# Altium PCB PCBd.PcbDoc
Units mm, origin at the board's own origin, x right, y up, seen from the top; angles counter-clockwise.
Board outline 100 x 100 mm, 2 copper layers (Top Layer, Bottom Layer); 119 components, 57 nets, 306 pads, 26 vias.
Unrouted connection lines stored in the file: 1.
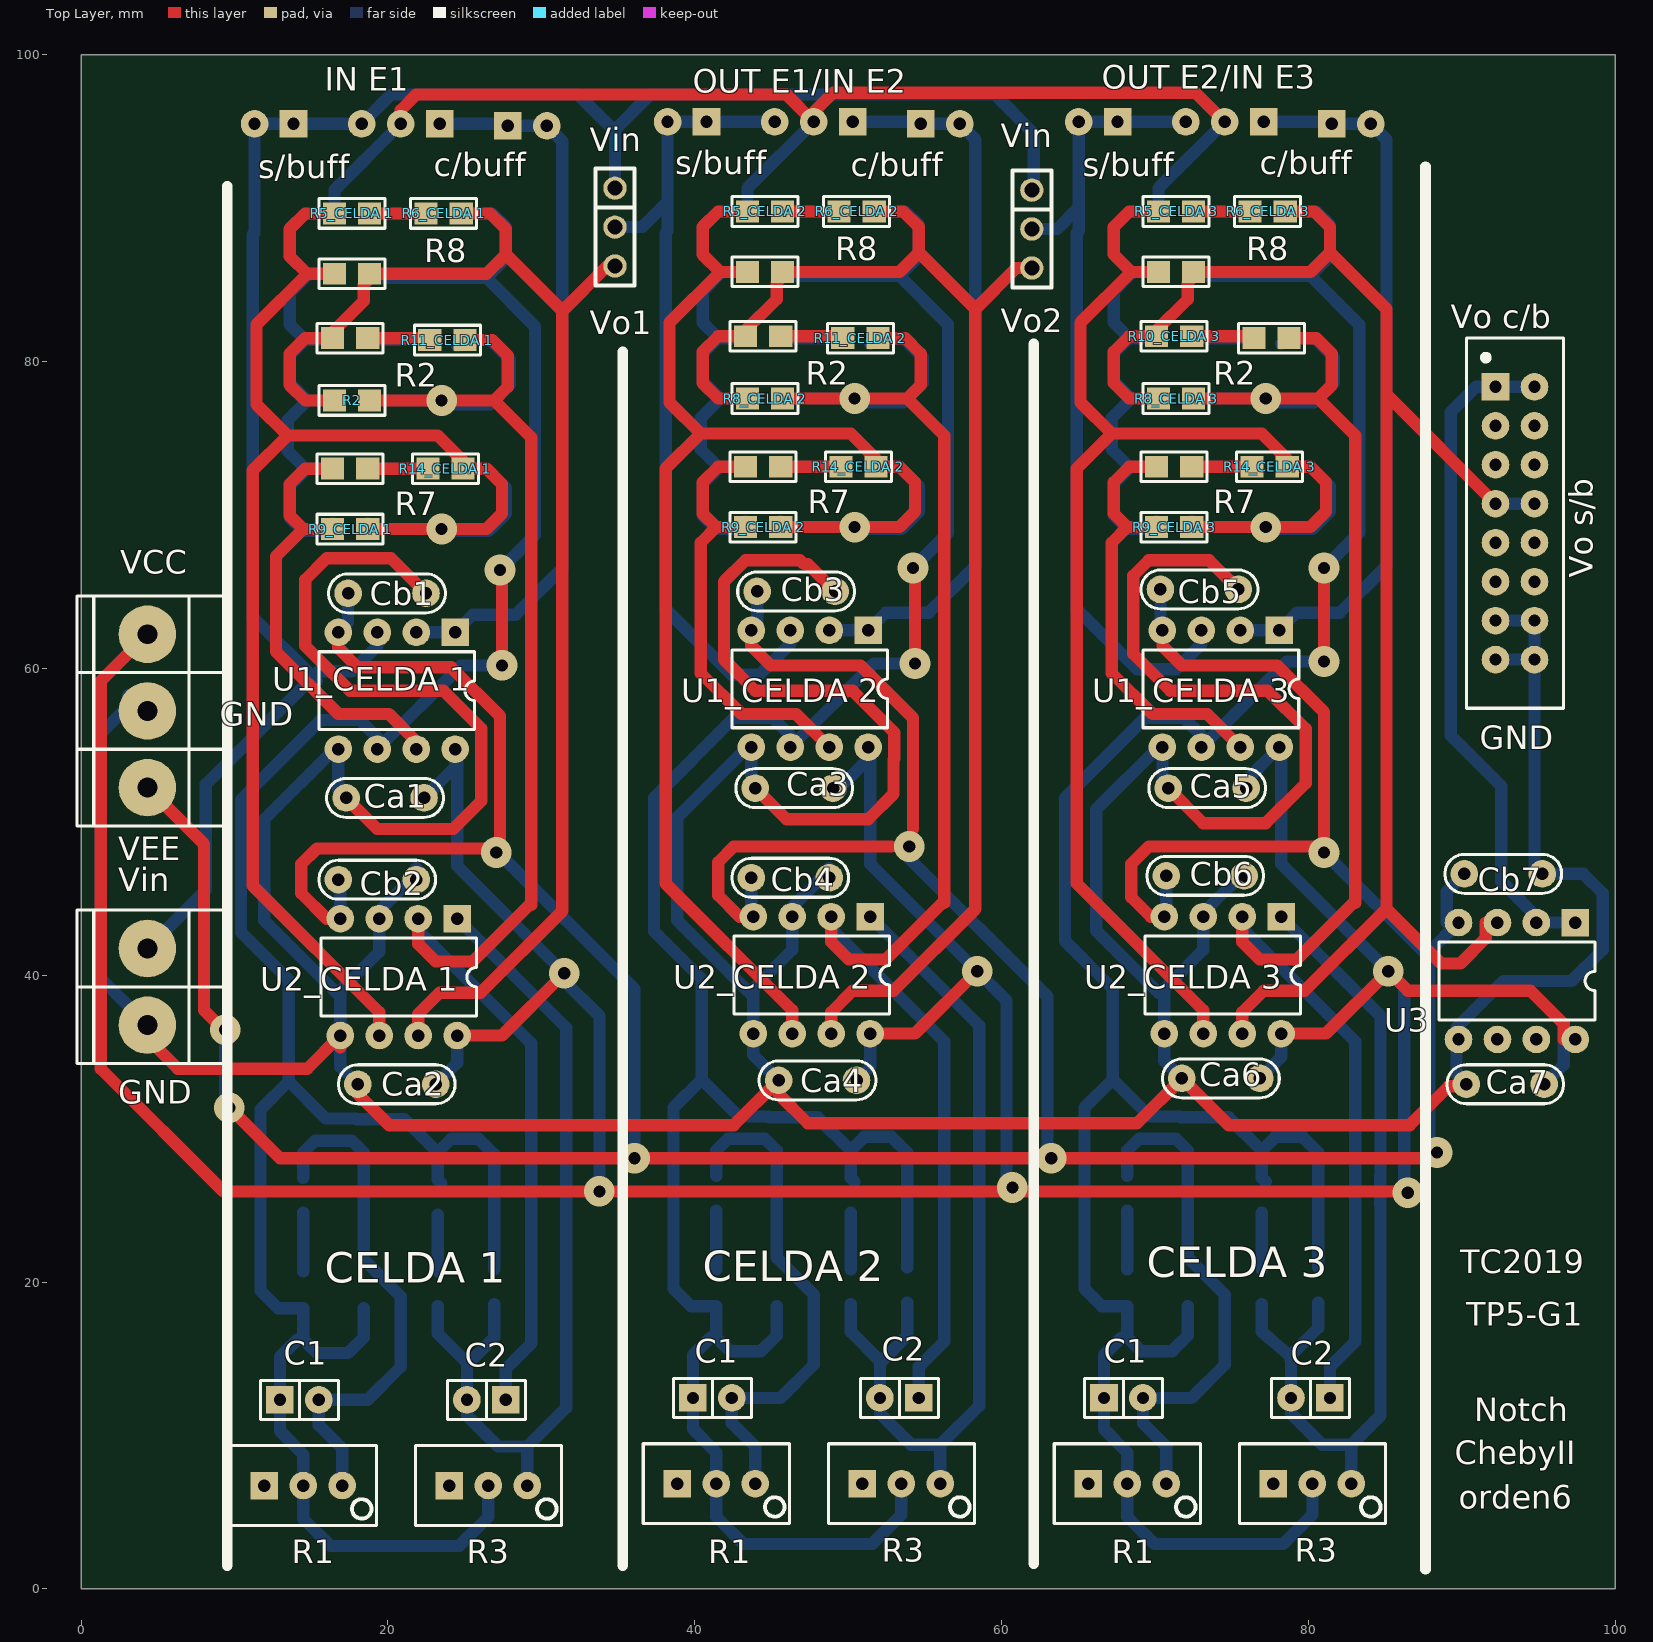
[diagram p0: Top Layer view]
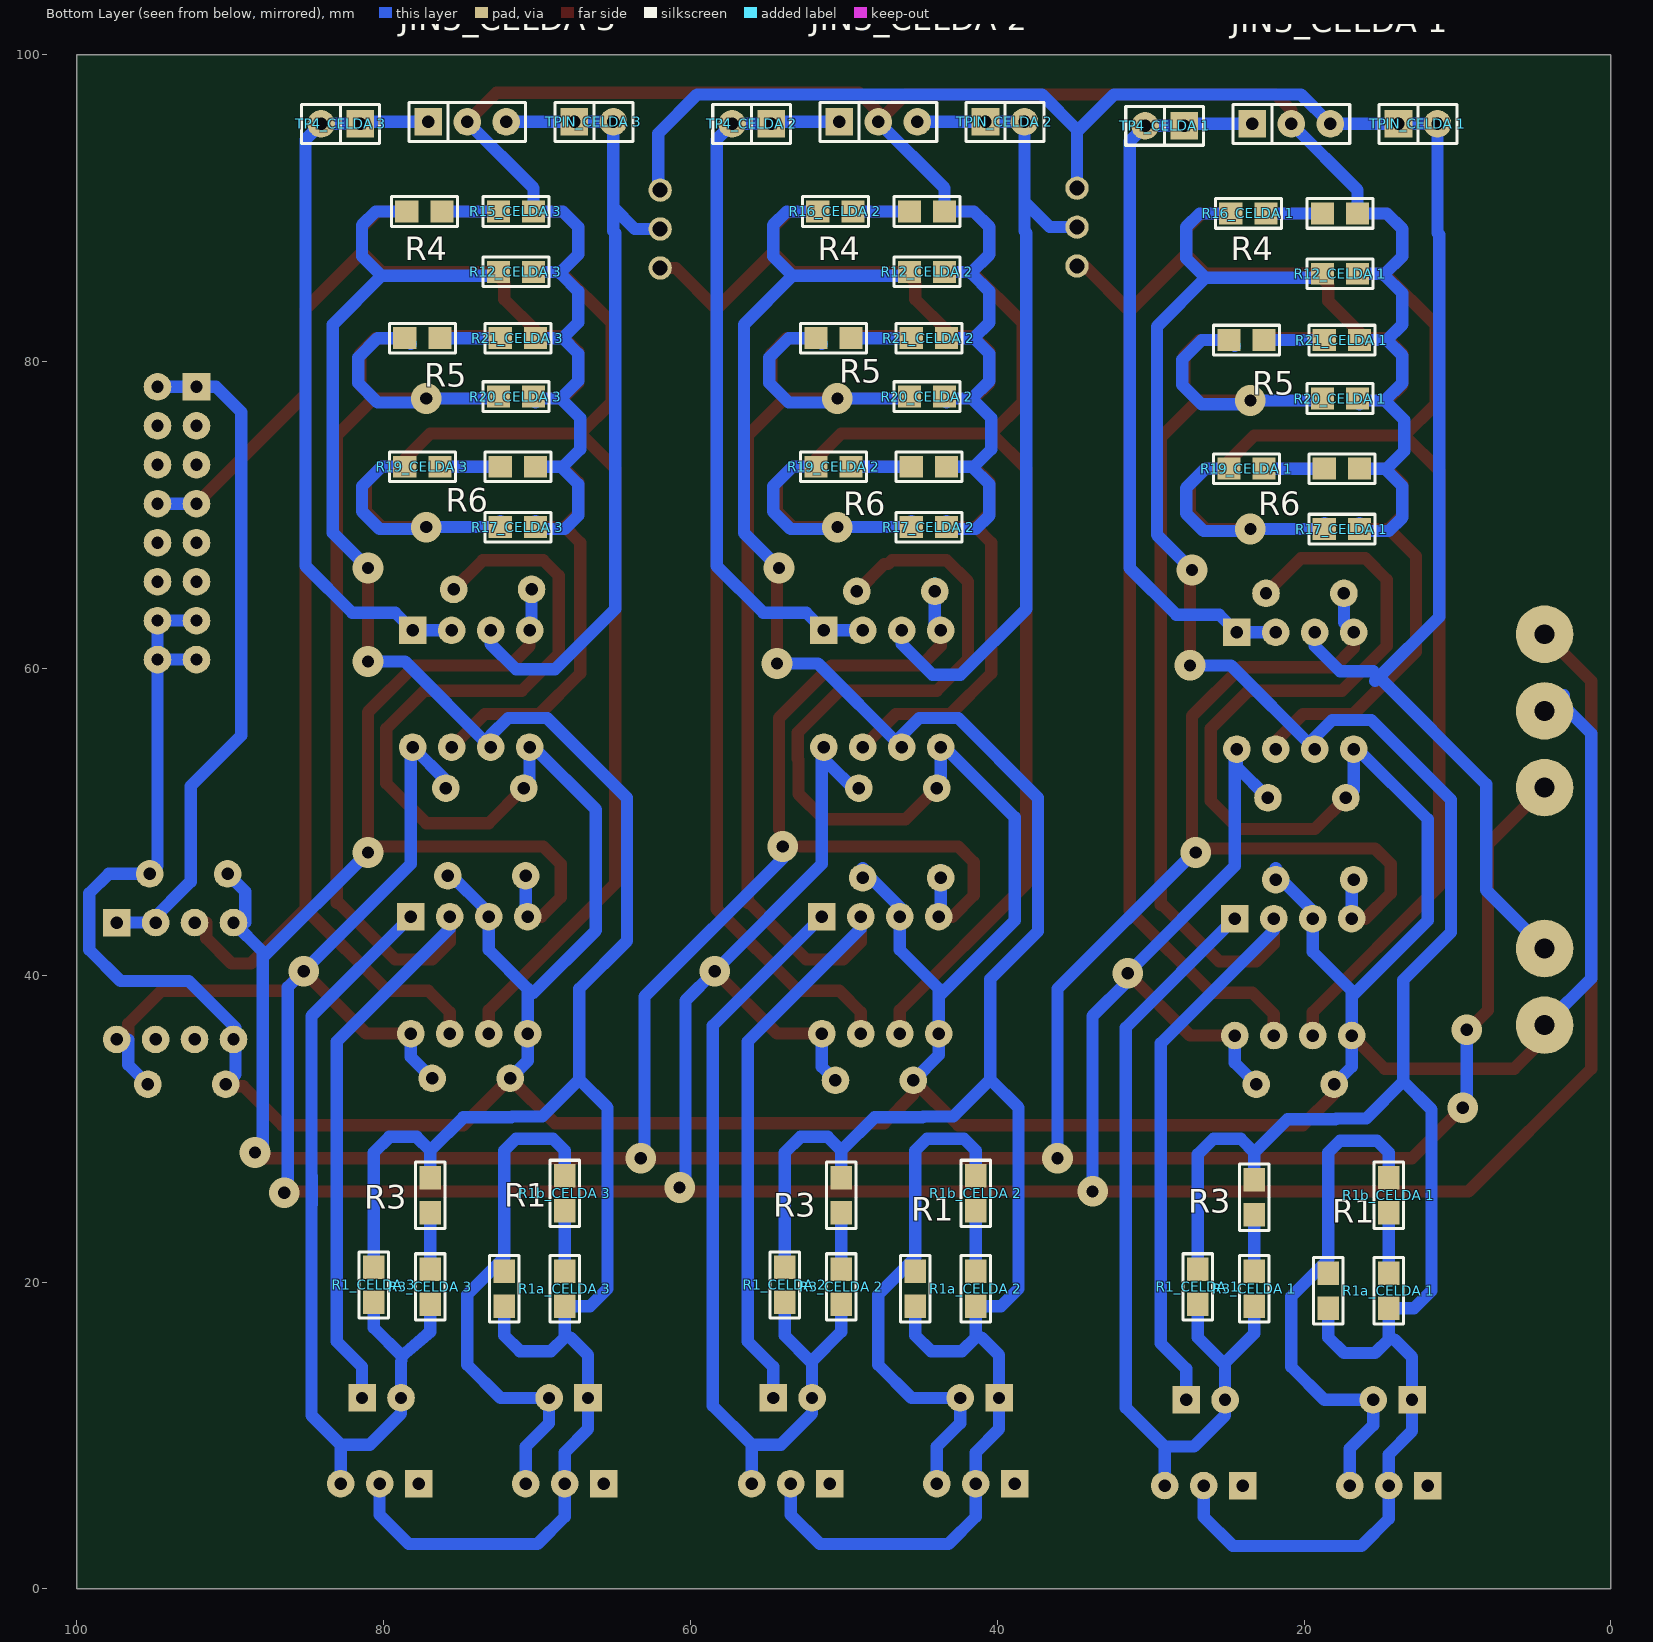
[diagram p1: Bottom Layer view, seen from below]

## Layer stack, top to bottom
Top Solder: solder mask 0.0102, Solder Resist, Dk 3.5
Top Layer: signal copper 0.0356
Dielectric 1: dielectric 0.32, FR-4, Dk 4.8
Bottom Layer: signal copper 0.0356
Bottom Solder: solder mask 0.0102, Solder Resist, Dk 3.5

## Board outline
0,0 100,0 100,100 0,100

## Design rules (kind name [scope] priority, off if disabled: settings)
Clearance [All] p1: gap=0.4 ignorepadtopadclearanceinfootprint=FALSE
PolygonConnect [All] p1: connectstyle=Relief reliefconductorwidth=0.254 reliefentries=4 polygonreliefangle="90 Angle" airgapwidth=0.254
RoomDefinition "CELDA 1" [InComponentClass('CELDA 1')] p1: confinementstyle=ConfineIn formatcopy=TRUE lockcomponents=FALSE outline 9.144,1.016 34.798,1.016 34.798,99.568 9.144,99.568
RoomDefinition filter [InComponentClass('filter')] p2: confinementstyle=ConfineIn formatcopy=TRUE lockcomponents=FALSE outline -17.653,-29.337 118.999,-29.337 118.999,-4.191 -17.653,-4.191
RoomDefinition "CELDA 3" [InComponentClass('CELDA 3')] p3: confinementstyle=ConfineIn formatcopy=TRUE lockcomponents=FALSE outline 62.865,1.143 88.519,1.143 88.519,99.695 62.865,99.695
RoomDefinition "CELDA 2" [InComponentClass('CELDA 2')] p4: confinementstyle=ConfineIn formatcopy=TRUE lockcomponents=FALSE outline 36.068,1.143 61.722,1.143 61.722,99.695 36.068,99.695
RoutingVias [All] p1: holewidth=0.4 width=2 viastyle="Through Hole" minholewidth=0.3 minwidth=1.5 maxholewidth=0.5 maxwidth=2
SolderMaskExpansion [All] p1: expansion=0.102
Width [All] p1: maxlimit=0.9 minlimit=0.6 preferedwidth=0.8
30 further rules are at their usual default settings.

## Classes and differential pairs
channel class fleischerTowR1: "CELDA 1" "CELDA 2" "CELDA 3"
component class filter: Ca1 Ca2 Ca3 Ca4 Ca5 Ca6 Ca7 Cb1 Cb2 Cb3 Cb4 Cb5 Cb6 Cb7 R7 U3 VCC VIN Vin
component class "CELDA 3": C1 C2 "JIN3_CELDA 3" R1 "R1a_CELDA 3" "R1b_CELDA 3" R2 R3 "R3_CELDA 3" R4 R5 "R5_CELDA 3" R6 "R6_CELDA 3" R7 R8 "R8_CELDA 3" "R9_CELDA 3" "R10_CELDA 3" "R12_CELDA 3" "R14_CELDA 3" "R15_CELDA 3" "R17_CELDA 3" "R19_CELDA 3" "R20_CELDA 3" "R21_CELDA 3" "TP4_CELDA 3" "TPIN_CELDA 3" "U1_CELDA 3" "U2_CELDA 3"
component class "CELDA 2": C1 C2 "JIN3_CELDA 2" R1 "R1_CELDA 2" "R1a_CELDA 2" "R1b_CELDA 2" R2 R3 "R3_CELDA 2" R4 R5 "R5_CELDA 2" R6 "R6_CELDA 2" R7 R8 "R8_CELDA 2" "R9_CELDA 2" "R11_CELDA 2" "R12_CELDA 2" "R14_CELDA 2" "R16_CELDA 2" "R17_CELDA 2" "R19_CELDA 2" "R20_CELDA 2" "R21_CELDA 2" "TP4_CELDA 2" "TPIN_CELDA 2" "U1_CELDA 2" "U2_CELDA 2"
component class "CELDA 1": C1 C2 "JIN3_CELDA 1" R1 "R1_CELDA 1" "R1a_CELDA 1" "R1b_CELDA 1" R2 R3 "R3_CELDA 1" R4 R5 "R5_CELDA 1" R6 "R6_CELDA 1" R7 R8 "R9_CELDA 1" "R11_CELDA 1" "R12_CELDA 1" "R14_CELDA 1" "R16_CELDA 1" "R17_CELDA 1" "R19_CELDA 1" "R20_CELDA 1" "R21_CELDA 1" "TP4_CELDA 1" "TPIN_CELDA 1" "U1_CELDA 1" "U2_CELDA 1"

## Components (designator, comment, footprint, x,y, rotation, side; value= is the part's Value field where it differs from the comment)
C1 "C1" SIP2 67.945,12.446 r0 top (schematic designator J2)
C1 "C1" SIP2 41.148,12.446 r0 top (schematic designator J2)
C1 "C1" SIP2 14.224,12.319 r0 top (schematic designator J2)
C2 "C2" SIP2 80.137,12.446 r180 top (schematic designator J1)
C2 "C2" SIP2 53.34,12.446 r180 top (schematic designator J1)
C2 "C2" SIP2 26.416,12.319 r180 top (schematic designator J1)
Ca1 "CAP" CAP200 19.812,51.562 r180 top
Ca2 "CAP" CAP200 20.574,32.893 r180 top
Ca3 "CAP" CAP200 46.482,52.197 r180 top
Ca4 "CAP" CAP200 48.006,33.147 r180 top
Ca5 "CAP" CAP200 73.406,52.197 r180 top
Ca6 "CAP" CAP200 74.295,33.274 r180 top
Ca7 "CAP" CAP200 92.837,32.893 r180 top
Cb1 "CAP" CAP200 19.939,64.897 r0 top
Cb2 "CAP" CAP200 19.304,46.228 r0 top
Cb3 "CAP" CAP200 46.609,65.024 r0 top
Cb4 "CAP" CAP200 46.228,46.355 r0 top
Cb5 "CAP" CAP200 72.898,65.151 r0 top
Cb6 "CAP" CAP200 73.279,46.482 r0 top
Cb7 "CAP" CAP200 92.71,46.609 r0 top
"JIN3_CELDA 1" "JUMPER" JUMPER3 20.828,95.504 r180 bottom (schematic designator JIN3)
"JIN3_CELDA 2" "JUMPER" JUMPER3 47.752,95.631 r180 bottom (schematic designator JIN3)
"JIN3_CELDA 3" "JUMPER" JUMPER3 74.549,95.631 r180 bottom (schematic designator JIN3)
R1 "PRESET" "PRESET V" 68.199,6.858 r0 top (schematic designator R1var)
R1 "PRESET" "PRESET V" 41.402,6.858 r0 top (schematic designator R1var)
R1 "PRESET" "PRESET V" 14.478,6.731 r0 top (schematic designator R1var)
R1 "RES" 0805 72.136,19.558 r90 bottom (schematic designator R1p)
R1 "RES" 0805 45.339,19.558 r90 bottom (schematic designator R1p)
R1 "RES" 0805 18.415,19.431 r90 bottom (schematic designator R1p)
"R1_CELDA 1" "RES" 0805 26.924,19.685 r270 bottom (schematic designator R1)
"R1_CELDA 2" "RES" 0805 53.848,19.812 r270 bottom (schematic designator R1)
"R1_CELDA 3" "RES" 0805 80.645,19.812 r270 bottom (schematic designator R1)
"R1a_CELDA 1" "RES" 0805 14.478,19.431 r90 bottom (schematic designator R1a)
"R1a_CELDA 2" "RES" 0805 41.402,19.558 r90 bottom (schematic designator R1a)
"R1a_CELDA 3" "RES" 0805 68.199,19.558 r90 bottom (schematic designator R1a)
"R1b_CELDA 1" "RES" 0805 14.478,25.654 r90 bottom (schematic designator R1b)
"R1b_CELDA 2" "RES" 0805 41.402,25.781 r90 bottom (schematic designator R1b)
"R1b_CELDA 3" "RES" 0805 68.199,25.781 r90 bottom (schematic designator R1b)
R2 "RES" 0805 77.597,81.534 r0 top (schematic designator R11)
R2 "RES" 0805 44.45,81.661 r0 top (schematic designator R10)
R2 "RES" 0805 17.526,81.534 r0 top (schematic designator R10)
R2 "RES" 0805 17.653,77.47 r0 top (schematic designator R8)
R3 "PRESET" "PRESET V" 80.264,6.858 r0 top (schematic designator R3var)
R3 "PRESET" "PRESET V" 53.467,6.858 r0 top (schematic designator R3var)
R3 "PRESET" "PRESET V" 26.543,6.731 r0 top (schematic designator R3var)
R3 "RES" 0805 76.962,25.654 r270 bottom (schematic designator R2)
R3 "RES" 0805 50.165,25.654 r270 bottom (schematic designator R2)
R3 "RES" 0805 23.241,25.527 r270 bottom (schematic designator R2)
"R3_CELDA 1" "RES" 0805 23.241,19.558 r270 bottom (schematic designator R3)
"R3_CELDA 2" "RES" 0805 50.165,19.685 r270 bottom (schematic designator R3)
"R3_CELDA 3" "RES" 0805 76.962,19.685 r270 bottom (schematic designator R3)
R4 "RES" 0805 77.343,89.789 r0 bottom (schematic designator R16)
R4 "RES" 0805 44.577,89.789 r0 bottom (schematic designator R15)
R4 "RES" 0805 17.653,89.662 r0 bottom (schematic designator R15)
R5 "RES" 0805 77.47,81.534 r0 bottom (schematic designator R22)
R5 "RES" 0805 50.673,81.534 r0 bottom (schematic designator R22)
R5 "RES" 0805 23.749,81.407 r0 bottom (schematic designator R22)
"R5_CELDA 1" "RES" 0805 17.653,89.662 r0 top (schematic designator R5)
"R5_CELDA 2" "RES" 0805 44.577,89.789 r0 top (schematic designator R5)
"R5_CELDA 3" "RES" 0805 71.374,89.789 r0 top (schematic designator R5)
R6 "RES" 0805 71.247,73.152 r0 bottom (schematic designator R18)
R6 "RES" 0805 44.45,73.152 r0 bottom (schematic designator R18)
R6 "RES" 0805 17.526,73.025 r0 bottom (schematic designator R18)
"R6_CELDA 1" "RES" 0805 23.622,89.662 r0 top (schematic designator R6)
"R6_CELDA 2" "RES" 0805 50.546,89.789 r0 top (schematic designator R6)
"R6_CELDA 3" "RES" 0805 77.343,89.789 r0 top (schematic designator R6)
R7 "RES" 0805 71.247,73.152 r0 top (schematic designator R13)
R7 "RES" 0805 44.45,73.152 r0 top (schematic designator R13)
R7 "RES" 0805 17.526,73.025 r0 top (schematic designator R13)
R8 "RES" 0805 71.374,85.852 r0 top (schematic designator R4)
R8 "RES" 0805 44.577,85.852 r0 top (schematic designator R4)
R8 "RES" 0805 17.653,85.725 r0 top (schematic designator R4)
"R8_CELDA 2" "RES" 0805 44.577,77.597 r0 top (schematic designator R8)
"R8_CELDA 3" "RES" 0805 71.374,77.597 r0 top (schematic designator R8)
"R9_CELDA 1" "RES" 0805 17.526,69.088 r0 top (schematic designator R9)
"R9_CELDA 2" "RES" 0805 44.45,69.215 r0 top (schematic designator R9)
"R9_CELDA 3" "RES" 0805 71.247,69.215 r0 top (schematic designator R9)
"R10_CELDA 3" "RES" 0805 71.247,81.661 r0 top (schematic designator R10)
"R11_CELDA 1" "RES" 0805 23.876,81.407 r0 top (schematic designator R11)
"R11_CELDA 2" "RES" 0805 50.8,81.534 r0 top (schematic designator R11)
"R12_CELDA 1" "RES" 0805 17.653,85.725 r0 bottom (schematic designator R12)
"R12_CELDA 2" "RES" 0805 44.577,85.852 r0 bottom (schematic designator R12)
"R12_CELDA 3" "RES" 0805 71.374,85.852 r0 bottom (schematic designator R12)
"R14_CELDA 1" "RES" 0805 23.749,73.025 r0 top (schematic designator R14)
"R14_CELDA 2" "RES" 0805 50.673,73.152 r0 top (schematic designator R14)
"R14_CELDA 3" "RES" 0805 77.47,73.152 r0 top (schematic designator R14)
"R15_CELDA 3" "RES" 0805 71.374,89.789 r0 bottom (schematic designator R15)
"R16_CELDA 1" "RES" 0805 23.622,89.662 r0 bottom (schematic designator R16)
"R16_CELDA 2" "RES" 0805 50.546,89.789 r0 bottom (schematic designator R16)
"R17_CELDA 1" "RES" 0805 17.526,69.088 r0 bottom (schematic designator R17)
"R17_CELDA 2" "RES" 0805 44.45,69.215 r0 bottom (schematic designator R17)
"R17_CELDA 3" "RES" 0805 71.247,69.215 r0 bottom (schematic designator R17)
"R19_CELDA 1" "RES" 0805 23.749,73.025 r0 bottom (schematic designator R19)
"R19_CELDA 2" "RES" 0805 50.673,73.152 r0 bottom (schematic designator R19)
"R19_CELDA 3" "RES" 0805 77.47,73.152 r0 bottom (schematic designator R19)
"R20_CELDA 1" "RES" 0805 17.653,77.597 r0 bottom (schematic designator R20)
"R20_CELDA 2" "RES" 0805 44.577,77.724 r0 bottom (schematic designator R20)
"R20_CELDA 3" "RES" 0805 71.374,77.724 r0 bottom (schematic designator R20)
"R21_CELDA 1" "RES" 0805 17.526,81.407 r0 bottom (schematic designator R21)
"R21_CELDA 2" "RES" 0805 44.45,81.534 r0 bottom (schematic designator R21)
"R21_CELDA 3" "RES" 0805 71.247,81.534 r0 bottom (schematic designator R21)
"TP4_CELDA 1" "JUMPER" JUMPER2 29.083,95.377 r0 bottom (schematic designator TP4)
"TP4_CELDA 2" "JUMPER" JUMPER2 56.007,95.504 r0 bottom (schematic designator TP4)
"TP4_CELDA 3" "JUMPER" JUMPER2 82.804,95.504 r0 bottom (schematic designator TP4)
"TPIN_CELDA 1" "JUMPER" JUMPER2 12.573,95.504 r180 bottom (schematic designator TPIN)
"TPIN_CELDA 2" "JUMPER" JUMPER2 39.497,95.631 r180 bottom (schematic designator TPIN)
"TPIN_CELDA 3" "JUMPER" JUMPER2 66.294,95.631 r180 bottom (schematic designator TPIN)
"U1_CELDA 1" "LM833" DIP8 24.384,62.357 r270 top (schematic designator U1)
"U1_CELDA 2" "LM833" DIP8 51.308,62.484 r270 top (schematic designator U1)
"U1_CELDA 3" "LM833" DIP8 78.105,62.484 r270 top (schematic designator U1)
"U2_CELDA 1" "LM833" DIP8 24.511,43.688 r270 top (schematic designator U2)
"U2_CELDA 2" "LM833" DIP8 51.435,43.815 r270 top (schematic designator U2)
"U2_CELDA 3" "LM833" DIP8 78.232,43.815 r270 top (schematic designator U2)
U3 "LM833" DIP8 97.409,43.434 r270 top
VCC "BORNERA 3" BORNERA3 4.318,57.23 r0 top (schematic designator JVCC1)
Vin "JUMPER" JUMPER3TH 61.976,91.186 r0 top (schematic designator Jin33)
Vin "JUMPER" JUMPER3TH 34.798,91.313 r0 top (schematic designator Jin2)
Vin "BORNERA 2" BORNERA2 4.318,39.243 r0 top (schematic designator JIN1)
? "OUTPUT" SIP8*2 92.202,78.359 r270 top

## Footprints (in the part's own frame and the unit in brackets; to place one, negate y for a bottom-side part, rotate by r counter-clockwise, add the part's x,y. Pads: shape width x height; smd on the part's side, far side on the other; paste and mask are expansions set on the pad)
0805 [mil] "Pasivo 0805"
  rect 60x56 smd: 1(-45,0) 2(45,0)
  silkscreen extent -85,-38 85,38, body extent -39,-25 39,25, height 15
BORNERA2 [mm] "Bornera con Tornillos 5mm separación"
  round 3.75 hole 1.3: 1(0,2.5) 2(0,-2.5)
  silkscreen extent -4.6,-5 5.2,5, body extent -3.76,-4.89 3.94,5.61, height 10
BORNERA3 [mm] "Bornera con Tornillos 5mm separación"
  round 3.75 hole 1.3: 1(0,5) 2(0,0) 3(0,-5)
  silkscreen extent -4.6,-7.5 5.2,7.5, body extent -3.76,-7.39 3.94,8.11, height 10.05
CAP200 [mm]
  round 1.8 hole 0.813: 1(-2.54,0) 2(2.54,0)
  silkscreen extent -3.81,-1.27 3.81,1.27, body extent -2.79,-1.17 2.79,1.12, height 6.24
DIP8 [mm]
  rect 1.8x1.8 hole 0.813: 1(0,0)
  round 1.8 hole 0.813: 2(0,-2.54) 3(0,-5.08) 4(0,-7.62) 5(7.62,-7.62) 6(7.62,-5.08) 7(7.62,-2.54) 8(7.62,0)
  silkscreen extent 1.27,-8.89 6.35,1.27, body extent -0.06,-9.21 7.7,1.59, height 4.5
JUMPER2 [mm]
  rect 1.8x1.8 hole 0.8: 1(-1.27,0)
  round 1.8 hole 0.8: 2(1.27,0)
  silkscreen extent -2.54,-1.27 2.54,1.27, body extent -2.46,-1.27 2.54,1.27, height 9.5
JUMPER3 [mm]
  rect 1.8x1.8 hole 0.8: 1(-2.54,0)
  round 1.8 hole 0.8: 2(0,0) 3(2.54,0)
  silkscreen extent -3.81,-1.27 3.81,1.27, body extent -3.81,-1.3 3.81,1.27, height 16.15
JUMPER3TH [mil]
  round 60 hole 38: 1(0,0) 2(0,-100) 3(0,-200)
  silkscreen extent -50,-250 50,50, body extent -49,-250 51,50, height 330
"PRESET V" [mm]
  rect 1.8x1.8 hole 0.813: 1(-2.54,0)
  round 1.8 hole 0.813: 2(0,0) 3(2.54,0)
  silkscreen extent -4.76,-2.6 4.76,2.6, body extent -4.7,-2.42 4.83,2.42, height 11.55
SIP2 [mm]
  rect 1.8x1.8 hole 0.8: 1(-1.27,0)
  round 1.8 hole 0.8: 2(1.27,0)
  silkscreen extent -2.54,-1.27 2.54,1.27
SIP8*2 [mm]
  rect 1.8x1.8 hole 0.8: 1(0,0)
  round 1.8 hole 0.8: 2(0,2.54) 3(2.54,0) 4(2.54,2.54) 5(5.08,0) 6(5.08,2.54) 7(7.62,0) 8(7.62,2.54) 9(10.16,0) 10(10.16,2.54) 11(12.7,0) 12(12.7,2.54) 13(15.24,0) 14(15.24,2.54) 15(17.78,0) 16(17.78,2.54)
  silkscreen extent -3.18,-1.91 20.95,4.45, body extent -1.26,-1.3 19.06,3.78, height 10.1

## Part data
C1 C1 C1 C2 C2 C2: library part CON2
"JIN3_CELDA 1" "JIN3_CELDA 2" "JIN3_CELDA 3": library part JUMPER3
"U1_CELDA 1" "U1_CELDA 2" "U1_CELDA 3" "U2_CELDA 1" "U2_CELDA 2" "U2_CELDA 3" U3: "Dual Audio Operational Amplifier"
Vin Vin: library part JUMPER3TH, "TIRA DE PINES 1x3"
?: library part CON8*2

## Via types
v1: diameter 2, hole 0.8, Top Layer to Bottom Layer, 26 vias

## Nets (pads, with @x,y where several pads share a name; then routed paths per layer and width w, separated by ;. In a path a pad name is that pad's centre, name@x,y a point inside that pad or via, vN(x,y) a via of type N, cw(c..) or ccw(c..) an arc to the next point about the centre after c; other vN are vias at no path point)
GND: "U1_CELDA 1.5" "U1_CELDA 2.5" "U1_CELDA 3.5" "U2_CELDA 1.3" "U2_CELDA 1.5" "U2_CELDA 2.3" "U2_CELDA 2.5" "U2_CELDA 3.3" "U2_CELDA 3.5" ?.13 ?.14 ?.15 ?.16 Ca1.2 Ca2.2 Ca3.2 Ca4.2 Ca5.2 Ca6.2 Ca7.2 Cb1.2 Cb2.2 Cb3.2 Cb4.2 Cb5.2 Cb6.2 Cb7.2 U3.5 VCC.2 Vin.2@4.318,36.743 | length 412.4
  Top Layer w0.8: Vin.2@3.302,36.91 6.303,33.909 14.732,33.909 16.891,36.068 16.891,35.306 ; Ca1.2 19.304,49.53 24.257,49.53 26.084,51.357 26.084,56.085 23.622,58.547 17.526,58.547 14.605,61.468 14.605,65.786 16.002,67.183 20.193,67.183 Cb1.2 ; Ca2.2 18.034,32.258 20.066,30.226 42.545,30.226 Ca4.2 45.466,32.258 47.371,30.353 68.834,30.353 Ca6.2 74.803,30.226 86.614,30.226 89.154,32.766 Ca7.2@90.17,32.766 ; Ca3.2 45.974,50.165 51.308,50.165 52.959,51.816 52.959,54.062 53.008,54.111 53.008,55.831 50.292,58.547 43.942,58.547 41.91,60.579 41.91,65.659 43.307,67.056 46.863,67.056 47.117,66.802 47.371,66.802 Cb3.2 ; Ca5.2 73.152,49.911 77.216,49.911 79.826,52.521 79.826,56.064 77.343,58.547 70.993,58.547 68.58,60.96 68.58,66.04 69.596,67.056 73.533,67.056 Cb5.2
  Bottom Layer w0.8: VCC.2@3.048,58.246 VCC.2@5.127,58.246 ; VCC.2@3.429,57.912 1.27,55.753 1.27,39.791 Vin.2@4.151,36.91 ; Vin.2@4.318,36.743 Vin.2@4.151,36.91 ; Vin.2@4.652,36.91 Vin.2@4.151,36.91 ; Ca1.2 16.764,52.07 16.764,54.737 16.51,54.737 11.938,50.165 11.938,43.561 16.891,38.608 ; Ca2.2 16.891,34.036 16.891,36.068 16.891,38.608 ; Cb2.2@21.844,46.99 21.844,46.609 19.431,44.196 19.431,43.688 19.431,41.529 16.891,38.989 16.891,38.608 ; Ca3.2@43.942,51.816 43.688,52.07 43.688,54.864 43.434,54.864 38.862,50.292 38.862,43.561 43.815,38.608 ; Ca4.2 43.815,34.798 43.815,36.195 43.815,38.608 ; Cb4.2@48.768,46.99 48.768,46.863 46.355,44.45 46.355,43.815 46.355,41.656 43.815,39.116 43.815,38.608 ; 70.231,38.862 66.167,42.926 66.167,50.8 70.231,54.864 70.485,54.864 70.485,52.197 70.866,51.816 Ca5.2@70.866,51.689 ; Ca6.2 70.612,34.417 70.612,36.195 70.612,39.116 73.152,41.656 73.152,43.815 73.152,44.069 Cb6.2@75.819,46.736 ; Ca7.2 89.662,33.528 89.662,36.576 92.71,39.624 97.155,39.624 99.187,41.656 99.187,45.339 97.917,46.609 Cb7.2 94.742,47.117 ?.16 ; ?.15 ?.16 ; ?.13 ?.14 ?.16
"NetJ1_CELDA 1_1": "R11_CELDA 1.2" "R20_CELDA 1.2" "U2_CELDA 1.2" C2.1@27.686,12.319 R2.2@18.796,77.47 R5.2@24.892,81.407 | length 110.3
  Top Layer w0.8: R2.2@18.796,77.47 v1(23.495,77.47) 26.924,77.47 ; 21.971,43.688 21.971,42.037 23.114,40.894 25.527,40.894 29.337,44.704 ; 25.019,81.407 26.797,81.407 27.813,80.391 27.813,78.359 26.924,77.47 ; 29.337,44.577 29.337,44.704 ; 26.924,77.47 29.337,75.057 29.337,44.704
  Bottom Layer w0.8: 18.796,77.597 18.923,77.47 v1(23.495,77.47) 23.749,77.216 26.67,77.216 27.94,78.486 27.94,80.137 26.67,81.407 24.892,81.407 R5.2@24.511,81.026 ; 21.971,43.688 21.971,42.926 29.337,35.56 29.337,16.002 27.686,14.351 C2.1@27.686,12.319
"NetJ1_CELDA 1_2": "R1_CELDA 1.2" "R3_CELDA 1.2" "U2_CELDA 1.1" C2.2@25.146,12.319 R3.3@29.083,6.731 | length 58.3
  Bottom Layer w0.8: 23.241,18.415 23.241,16.637 25.209,14.668 ; 24.511,43.688 31.623,36.576 31.623,11.811 29.083,9.271 ; 26.924,18.542 26.924,16.383 25.209,14.668 ; R3.3@29.083,6.731 29.083,9.271 ; 25.209,14.668 25.146,14.605 25.146,12.319 25.146,11.303 27.178,9.271 29.083,9.271
"NetJ1_CELDA 2_1": "R8_CELDA 2.2" "R11_CELDA 2.2" "R20_CELDA 2.2" "U2_CELDA 2.2" C2.1@54.61,12.446 R5.2@51.816,81.534 | length 110.3
  Top Layer w0.8: 45.72,77.597 v1(50.419,77.597) 53.848,77.597 ; 48.895,43.815 48.895,42.164 50.038,41.021 52.451,41.021 56.261,44.831 ; 51.943,81.534 53.721,81.534 54.737,80.518 54.737,78.486 53.848,77.597 ; 56.261,44.704 56.261,44.831 ; 53.848,77.597 56.261,75.184 56.261,44.831
  Bottom Layer w0.8: 45.72,77.724 45.847,77.597 v1(50.419,77.597) 50.673,77.343 53.594,77.343 54.864,78.613 54.864,80.264 53.594,81.534 51.816,81.534 R5.2@51.435,81.153 ; 48.895,43.815 48.895,43.053 56.261,35.687 56.261,16.129 54.61,14.478 C2.1@54.61,12.446
"NetJ1_CELDA 2_2": "R1_CELDA 2.2" "R3_CELDA 2.2" "U2_CELDA 2.1" C2.2@52.07,12.446 R3.3@56.007,6.858 | length 58.3
  Bottom Layer w0.8: 50.165,18.542 50.165,16.764 52.133,14.795 ; 51.435,43.815 58.547,36.703 58.547,11.938 56.007,9.398 ; 53.848,18.669 53.848,16.51 52.133,14.795 ; R3.3@56.007,6.858 56.007,9.398 ; 52.133,14.795 52.07,14.732 52.07,12.446 52.07,11.43 54.102,9.398 56.007,9.398
"NetJ1_CELDA 3_1": "R8_CELDA 3.2" "R20_CELDA 3.2" "U2_CELDA 3.2" C2.1@81.407,12.446 R2.2@78.74,81.534 R5.2@78.613,81.534 | length 110.3
  Top Layer w0.8: 72.517,77.597 v1(77.216,77.597) 80.645,77.597 ; 75.692,43.815 75.692,42.164 76.835,41.021 79.248,41.021 83.058,44.831 ; R2.2@78.74,81.534 80.518,81.534 81.534,80.518 81.534,78.486 80.645,77.597 ; 83.058,44.704 83.058,44.831 ; 80.645,77.597 83.058,75.184 83.058,44.831
  Bottom Layer w0.8: 72.517,77.724 72.644,77.597 v1(77.216,77.597) 77.47,77.343 80.391,77.343 81.661,78.613 81.661,80.264 80.391,81.534 78.613,81.534 R5.2@78.232,81.153 ; 75.692,43.815 75.692,43.053 83.058,35.687 83.058,16.129 81.407,14.478 C2.1@81.407,12.446
"NetJ1_CELDA 3_2": "R1_CELDA 3.2" "R3_CELDA 3.2" "U2_CELDA 3.1" C2.2@78.867,12.446 R3.3@82.804,6.858 | length 57.4
  Bottom Layer w0.8: 76.962,18.542 76.962,16.764 78.803,15.176 ; 78.232,43.815 84.709,37.338 84.709,26.93 84.687,26.908 84.687,25.067 84.709,25.045 84.709,11.303 82.804,9.398 ; 80.645,18.669 80.645,17.018 78.803,15.176 ; R3.3@82.804,6.858 82.804,9.398 ; 78.803,15.176 78.867,14.732 78.867,12.446 78.867,11.43 80.899,9.398 82.804,9.398
"NetJ2_CELDA 1_1": "R1_CELDA 1.1" "R1a_CELDA 1.1" "R12_CELDA 1.2" "R16_CELDA 1.2" "U1_CELDA 1.6" C1.1@12.954,12.319 R1.1@18.415,18.288 R1.2@14.478,6.731 R3.1@23.241,26.67 R3.2@26.543,6.731 | length 165.4
  Top Layer w0.8: v1(27.305,66.421) 27.432,66.294 v1(27.432,60.198)
  Bottom Layer w0.8: R1.1@18.415,18.288 18.415,16.383 17.399,15.367 15.367,15.367 14.478,16.256 ; 18.923,85.471 26.416,85.471 ; R3.1@23.495,26.416 23.241,26.67 23.241,28.448 ; 24.765,89.662 26.797,89.662 27.686,88.773 27.686,86.741 26.416,85.471 ; R3.2@26.543,6.731 26.543,4.699 24.638,2.794 16.256,2.794 14.478,4.572 14.478,6.731 14.478,8.763 12.954,10.287 12.954,12.319 12.954,15.113 14.097,16.256 14.478,16.256 ; 26.924,20.828 26.924,28.321 25.908,29.337 24.13,29.337 23.241,28.448 ; v1(27.305,66.421) 29.591,68.707 29.591,82.296 26.416,85.471 ; v1(27.432,60.198) 24.765,60.198 19.304,54.737 19.304,55.499 18.161,56.642 15.621,56.642 10.414,51.435 10.414,42.799 13.525,39.688 13.525,33.084 ; 13.525,33.084 11.684,31.242 11.684,19.431 12.827,18.288 14.478,18.288 14.478,16.256 ; 13.525,33.084 15.945,30.664 17.896,30.664 17.953,30.607 21.082,30.607 23.241,28.448
"NetJ2_CELDA 1_2": "R1b_CELDA 1.2" C1.2@15.494,12.319 R1.2@18.415,20.574 R1.3@17.018,6.731 | length 33.6
  Bottom Layer w0.8: 14.478,26.797 14.478,28.448 15.24,29.21 17.653,29.21 18.415,28.448 18.415,21.463 20.828,19.05 20.828,14.478 18.669,12.319 15.494,12.319 15.494,10.668 17.018,9.144 R1.3@17.018,6.731
"NetJ2_CELDA 2_1": "R1_CELDA 2.1" "R1a_CELDA 2.1" "R12_CELDA 2.2" "R16_CELDA 2.2" "U1_CELDA 2.6" C1.1@39.878,12.446 R1.1@45.339,18.415 R1.2@41.402,6.858 R3.1@50.165,26.797 R3.2@53.467,6.858 | length 165.4
  Top Layer w0.8: v1(54.229,66.548) 54.356,66.421 v1(54.356,60.325)
  Bottom Layer w0.8: R1.1@45.339,18.415 45.339,16.51 44.323,15.494 42.291,15.494 41.402,16.383 ; 45.847,85.598 53.34,85.598 ; R3.1@50.419,26.543 50.165,26.797 50.165,28.575 ; 51.689,89.789 53.721,89.789 54.61,88.9 54.61,86.868 53.34,85.598 ; R3.2@53.467,6.858 53.467,4.826 51.562,2.921 43.18,2.921 41.402,4.699 41.402,6.858 41.402,8.89 39.878,10.414 39.878,12.446 39.878,15.24 41.021,16.383 41.402,16.383 ; 53.848,20.955 53.848,28.448 52.832,29.464 51.054,29.464 50.165,28.575 ; v1(54.229,66.548) 56.515,68.834 56.515,82.423 53.34,85.598 ; v1(54.356,60.325) 51.689,60.325 46.228,54.864 46.228,55.626 45.085,56.769 42.545,56.769 37.338,51.562 37.338,42.862 40.45,39.751 40.45,33.21 ; 40.45,33.21 38.608,31.369 38.608,19.558 39.751,18.415 41.402,18.415 41.402,16.383 ; 40.45,33.21 42.869,30.791 44.82,30.791 44.877,30.734 48.006,30.734 50.165,28.575
"NetJ2_CELDA 2_2": "R1b_CELDA 2.2" C1.2@42.418,12.446 R1.2@45.339,20.701 R1.3@43.942,6.858 | length 33.6
  Bottom Layer w0.8: 41.402,26.924 41.402,28.575 42.164,29.337 44.577,29.337 45.339,28.575 45.339,21.59 47.752,19.177 47.752,14.605 45.593,12.446 42.418,12.446 42.418,10.795 43.942,9.271 R1.3@43.942,6.858
"NetJ2_CELDA 3_1": "R1_CELDA 3.1" "R1a_CELDA 3.1" "R12_CELDA 3.2" "U1_CELDA 3.6" C1.1@66.675,12.446 R1.1@72.136,18.415 R1.2@68.199,6.858 R3.1@76.962,26.797 R3.2@80.264,6.858 R4.2@78.486,89.789 | length 165.1
  Top Layer w0.8: v1(81.026,60.452) v1(81.026,66.548)
  Bottom Layer w0.8: R1.1@72.136,18.415 72.136,16.51 71.12,15.494 69.088,15.494 68.199,16.383 ; 72.644,85.598 80.137,85.598 ; R3.1@77.216,26.543 76.962,26.797 76.962,28.575 ; R4.2@78.486,89.789 80.518,89.789 81.407,88.9 81.407,86.868 80.137,85.598 ; R3.2@80.264,6.858 80.264,4.826 78.359,2.921 69.977,2.921 68.199,4.699 68.199,6.858 68.199,8.89 66.675,10.414 66.675,12.446 66.675,15.24 67.818,16.383 68.199,16.383 ; 80.645,20.955 80.645,28.448 79.629,29.464 77.851,29.464 76.962,28.575 ; v1(81.026,60.452) 78.613,60.452 73.025,54.864 73.025,55.626 71.882,56.769 69.342,56.769 64.135,51.562 64.135,42.227 67.246,39.116 67.246,33.21 ; v1(81.026,66.548) 83.312,68.834 83.312,82.423 80.137,85.598 ; 67.246,33.21 69.666,30.791 71.617,30.791 71.674,30.734 74.803,30.734 76.962,28.575 ; 67.246,33.21 65.405,31.369 65.405,19.558 66.548,18.415 68.199,18.415 68.199,16.383
"NetJ2_CELDA 3_2": "R1b_CELDA 3.2" C1.2@69.215,12.446 R1.2@72.136,20.701 R1.3@70.739,6.858 | length 33.6
  Bottom Layer w0.8: 68.199,26.924 68.199,28.575 68.961,29.337 71.374,29.337 72.136,28.575 72.136,21.59 74.549,19.177 74.549,14.605 72.39,12.446 69.215,12.446 69.215,10.795 70.739,9.271 R1.3@70.739,6.858
"NetJIN3_CELDA 1_1": "JIN3_CELDA 1.1" "TP4_CELDA 1.1" "TP4_CELDA 1.2" "U1_CELDA 1.1" "U1_CELDA 1.2" | length 47.5
  Bottom Layer w0.8: 21.844,62.357 24.384,62.357 25.527,63.5 28.321,63.5 31.369,66.548 31.369,94.361 30.353,95.377 27.813,95.377 27.686,95.504 23.368,95.504
"NetJIN3_CELDA 2_1": "JIN3_CELDA 2.1" "TP4_CELDA 2.1" "TP4_CELDA 2.2" "U1_CELDA 2.1" "U1_CELDA 2.2" | length 47.5
  Bottom Layer w0.8: 48.768,62.484 51.308,62.484 52.451,63.627 55.245,63.627 58.293,66.675 58.293,94.488 57.277,95.504 54.737,95.504 54.61,95.631 50.292,95.631
"NetJIN3_CELDA 3_1": "JIN3_CELDA 3.1" "TP4_CELDA 3.1" "TP4_CELDA 3.2" "U1_CELDA 3.1" "U1_CELDA 3.2" | length 47.5
  Bottom Layer w0.8: 75.565,62.484 78.105,62.484 79.248,63.627 82.042,63.627 85.09,66.675 85.09,94.488 84.074,95.504 81.534,95.504 81.407,95.631 77.089,95.631
"NetR1a_CELDA 1_2": "R1a_CELDA 1.2" "R1b_CELDA 1.1" | length 3.8
  Bottom Layer w0.8: 14.478,20.701 14.478,24.511
"NetR1a_CELDA 2_2": "R1a_CELDA 2.2" "R1b_CELDA 2.1" | length 3.8
  Bottom Layer w0.8: 41.402,20.828 41.402,24.638
"NetR1a_CELDA 3_2": "R1a_CELDA 3.2" "R1b_CELDA 3.1" | length 3.8
  Bottom Layer w0.8: 68.199,20.828 68.199,24.638
"NetR2_CELDA 1_2": "R3_CELDA 1.1" R3.2@23.241,24.384 | length 3.7
  Bottom Layer w0.8: 23.241,20.701 R3.2@23.241,24.384
"NetR2_CELDA 2_2": "R3_CELDA 2.1" R3.2@50.165,24.511 | length 3.7
  Bottom Layer w0.8: 50.165,20.828 R3.2@50.165,24.511
"NetR2_CELDA 3_2": "R3_CELDA 3.1" R3.2@76.962,24.511 | length 3.7
  Bottom Layer w0.8: 76.962,20.828 R3.2@76.962,24.511
"NetR4_CELDA 1_1": "R5_CELDA 1.1" "R9_CELDA 1.2" "R14_CELDA 1.2" "R17_CELDA 1.2" "R19_CELDA 1.2" "U2_CELDA 1.6" R8.1@16.51,85.725 | length 106.5
  Top Layer w0.8: R8.1@16.51,85.725 14.732,85.725 ; 16.51,89.662 14.605,89.662 13.589,88.646 13.589,86.868 14.732,85.725 ; 18.669,69.088 v1(23.495,69.088) 26.416,69.088 27.432,70.104 27.432,72.009 26.416,73.025 24.892,73.025 24.892,73.533 23.241,75.184 13.462,75.184 ; 19.431,36.068 19.431,37.592 11.176,45.847 11.176,72.898 13.462,75.184 ; 13.462,75.184 11.43,77.216 11.43,82.423 14.732,85.725
  Bottom Layer w0.8: 18.669,69.088 19.05,69.088 ; 18.669,69.469 19.05,69.088 ; 24.892,73.025 26.416,73.025 27.686,71.755 27.686,70.104 26.543,68.961 23.622,68.961 v1(23.495,69.088) 19.05,69.088
"NetR4_CELDA 2_1": "R5_CELDA 2.1" "R9_CELDA 2.2" "R14_CELDA 2.2" "R17_CELDA 2.2" "R19_CELDA 2.2" "U2_CELDA 2.6" R8.1@43.434,85.852 | length 106.5
  Top Layer w0.8: R8.1@43.434,85.852 41.656,85.852 ; 43.434,89.789 41.529,89.789 40.513,88.773 40.513,86.995 41.656,85.852 ; 45.593,69.215 v1(50.419,69.215) 53.34,69.215 54.356,70.231 54.356,72.136 53.34,73.152 51.816,73.152 51.816,73.66 50.165,75.311 40.386,75.311 ; 46.355,36.195 46.355,37.719 38.1,45.974 38.1,73.025 40.386,75.311 ; 40.386,75.311 38.354,77.343 38.354,82.55 41.656,85.852
  Bottom Layer w0.8: 45.593,69.215 45.974,69.215 ; 45.593,69.596 45.974,69.215 ; 51.816,73.152 53.34,73.152 54.61,71.882 54.61,70.231 53.467,69.088 50.546,69.088 v1(50.419,69.215) 45.974,69.215
"NetR4_CELDA 3_1": "R5_CELDA 3.1" "R9_CELDA 3.2" "R14_CELDA 3.2" "R17_CELDA 3.2" "R19_CELDA 3.2" "U2_CELDA 3.6" R8.1@70.231,85.852 | length 106.5
  Top Layer w0.8: R8.1@70.231,85.852 68.453,85.852 ; 70.231,89.789 68.326,89.789 67.31,88.773 67.31,86.995 68.453,85.852 ; 72.39,69.215 v1(77.216,69.215) 80.137,69.215 81.153,70.231 81.153,72.136 80.137,73.152 78.613,73.152 78.613,73.66 76.962,75.311 67.183,75.311 ; 73.152,36.195 73.152,37.719 64.897,45.974 64.897,73.025 67.183,75.311 ; 67.183,75.311 65.151,77.343 65.151,82.55 68.453,85.852
  Bottom Layer w0.8: 72.39,69.215 72.771,69.215 ; 72.39,69.596 72.771,69.215 ; 78.613,73.152 80.137,73.152 81.407,71.882 81.407,70.231 80.264,69.088 77.343,69.088 v1(77.216,69.215) 72.771,69.215
"NetR5_CELDA 1_2": "R5_CELDA 1.2" "R6_CELDA 1.1" | length 3.7
  Top Layer w0.8: 18.796,89.662 22.479,89.662
"NetR5_CELDA 2_2": "R5_CELDA 2.2" "R6_CELDA 2.1" | length 3.7
  Top Layer w0.8: 45.72,89.789 49.403,89.789
"NetR5_CELDA 3_2": "R5_CELDA 3.2" "R6_CELDA 3.1" | length 3.7
  Top Layer w0.8: 72.517,89.789 76.2,89.789
"NetR9_CELDA 1_1": "R9_CELDA 1.1" "U1_CELDA 1.7" R7.1@16.383,73.025 | length 29.2
  Top Layer w0.8: 16.383,69.088 14.478,69.088 ; R7.1@16.383,73.025 14.605,73.025 13.589,72.009 13.589,69.977 14.478,69.088 ; 21.844,54.737 21.844,55.245 20.066,57.023 16.764,57.023 12.7,61.087 12.7,67.31 14.478,69.088
"NetR9_CELDA 2_1": "R9_CELDA 2.1" "U1_CELDA 2.7" R7.1@43.307,73.152 | length 28.7
  Top Layer w0.8: 43.307,69.215 41.402,69.215 ; R7.1@43.307,73.152 41.529,73.152 40.513,72.136 40.513,70.104 41.402,69.215 ; 48.768,54.864 46.609,57.023 43.053,57.023 40.386,59.69 40.386,68.199 41.402,69.215
"NetR9_CELDA 3_1": "R9_CELDA 3.1" "U1_CELDA 3.7" R7.1@70.104,73.152 | length 28.7
  Top Layer w0.8: 70.104,69.215 68.199,69.215 ; R7.1@70.104,73.152 68.326,73.152 67.31,72.136 67.31,70.104 68.199,69.215 ; 75.565,54.864 73.406,57.023 69.85,57.023 67.183,59.69 67.183,68.199 68.199,69.215
"NetR10_CELDA 1_2": "R11_CELDA 1.1" R2.2@18.669,81.534 | length 4.1
  Top Layer w0.8: R2.2@18.669,81.534 22.606,81.534 22.733,81.407
"NetR10_CELDA 2_2": "R11_CELDA 2.1" R2.2@45.593,81.661 | length 4.1
  Top Layer w0.8: R2.2@45.593,81.661 49.53,81.661 49.657,81.534
"NetR10_CELDA 3_2": "R10_CELDA 3.2" R2.1@76.454,81.534 | length 4.1
  Top Layer w0.8: 72.39,81.661 76.327,81.661 R2.1@76.454,81.534
"NetR13_CELDA 1_2": "R14_CELDA 1.1" R7.2@18.669,73.025 | length 3.9
  Top Layer w0.8: R7.2@18.669,73.025 22.606,73.025
"NetR13_CELDA 2_2": "R14_CELDA 2.1" R7.2@45.593,73.152 | length 3.9
  Top Layer w0.8: R7.2@45.593,73.152 49.53,73.152
"NetR13_CELDA 3_2": "R14_CELDA 3.1" R7.2@72.39,73.152 | length 3.9
  Top Layer w0.8: R7.2@72.39,73.152 76.327,73.152
"NetR15_CELDA 1_2": "R16_CELDA 1.1" R4.2@18.796,89.662 | length 3.4
  Bottom Layer w0.8: R4.2@19.05,89.662 22.479,89.662
"NetR15_CELDA 2_2": "R16_CELDA 2.1" R4.2@45.72,89.789 | length 3.4
  Bottom Layer w0.8: R4.2@45.974,89.789 49.403,89.789
"NetR15_CELDA 3_2": "R15_CELDA 3.2" R4.1@76.2,89.789 | length 3.4
  Bottom Layer w0.8: 72.771,89.789 R4.1@76.2,89.789
"NetR18_CELDA 1_2": "R19_CELDA 1.1" R6.2@18.669,73.025 | length 3.7
  Bottom Layer w0.8: R6.2@18.923,73.025 22.606,73.025
"NetR18_CELDA 2_2": "R19_CELDA 2.1" R6.2@45.593,73.152 | length 3.7
  Bottom Layer w0.8: R6.2@45.847,73.152 49.53,73.152
"NetR18_CELDA 3_2": "R19_CELDA 3.1" R6.2@72.39,73.152 | length 3.7
  Bottom Layer w0.8: R6.2@72.644,73.152 76.327,73.152
"NetR21_CELDA 1_2": "R21_CELDA 1.2" R5.1@22.606,81.407 | length 3.9
  Bottom Layer w0.8: 18.669,81.407 R5.1@22.606,81.407
"NetR21_CELDA 2_2": "R21_CELDA 2.2" R5.1@49.53,81.534 | length 3.9
  Bottom Layer w0.8: 45.593,81.534 R5.1@49.53,81.534
"NetR21_CELDA 3_2": "R21_CELDA 3.2" R5.1@76.327,81.534 | length 3.9
  Bottom Layer w0.8: 72.39,81.534 R5.1@76.327,81.534
NetU3_6: U3.6 U3.7
VCC: "U1_CELDA 1.8" "U1_CELDA 2.8" "U1_CELDA 3.8" "U2_CELDA 1.8" "U2_CELDA 2.8" "U2_CELDA 3.8" Ca1.1 Ca2.1 Ca3.1 Ca4.1 Ca5.1 Ca6.1 Ca7.1 U3.8 VCC.1 | length 283.3
  Top Layer w0.8: VCC.1 1.27,59.182 1.27,33.909 9.271,25.908 v1(33.782,25.908) 34.036,25.908 34.29,26.162 34.544,25.908 60.452,25.908 v1(60.706,26.162) 61.087,26.162 61.341,25.908 v1@86.487,25.908 ; 24.511,36.068 27.432,36.068 v1(31.496,40.132) ; 51.435,36.195 54.356,36.195 v1(58.42,40.259) ; 78.232,36.195 81.153,36.195 v1(85.217,40.259) 86.487,38.989 94.488,38.989 96.647,36.83 U3.8@96.647,35.814 ; v1(86.487,25.813) v1@86.487,25.908 ; v1@86.868,25.527 v1@86.487,25.908
  Bottom Layer w0.8: Ca1.1 24.384,53.594 24.384,54.737 24.511,54.61 24.511,47.117 v1(31.496,40.132) 31.496,39.624 33.782,37.338 v1(33.782,25.908) ; Ca2.1 24.511,34.29 24.511,36.068 ; Ca3.1@49.022,51.816 51.308,54.102 51.308,54.864 51.435,54.737 51.435,47.244 v1(58.42,40.259) 60.325,38.354 60.325,26.543 v1(60.706,26.162) ; Ca4.1 51.435,34.036 51.435,36.195 ; Ca5.1@75.946,51.816 75.946,52.705 78.105,54.864 78.232,54.737 78.232,47.244 v1(85.217,40.259) 86.254,39.222 86.254,26.046 86.312,25.987 86.487,26.162 v1(86.487,25.813) ; Ca6.1 78.232,34.671 78.232,36.195 ; Ca7.1 96.647,34.163 U3.8@96.647,35.814
VEE: "U1_CELDA 1.4" "U1_CELDA 2.4" "U1_CELDA 3.4" "U2_CELDA 1.4" "U2_CELDA 2.4" "U2_CELDA 3.4" Cb1.1 Cb2.1 Cb3.1 Cb4.1 Cb5.1 Cb6.1 Cb7.1 U3.4 VCC.3 | length 316.6
  Top Layer w0.8: VCC.3 8.001,48.547 8.001,37.719 9.271,36.449 v1(9.398,36.449) ; v1(9.652,31.369) 12.954,28.067 v1(36.068,28.067) v1(63.246,28.067) 88.392,28.067 v1(88.392,28.448) ; 16.764,62.357 16.764,61.341 18.034,60.071 24.13,60.071 27.305,56.896 v1@27.305,48.641 ; 16.891,43.688 16.002,43.688 14.351,45.339 14.351,47.244 15.367,48.26 26.797,48.26 v1(27.051,48.006) ; 43.688,62.484 43.688,61.468 44.958,60.198 50.8,60.198 54.229,56.769 54.229,49.53 ; 43.815,43.815 42.926,43.815 41.529,45.212 41.529,47.371 42.545,48.387 52.832,48.387 ; 70.485,62.484 70.485,61.468 71.755,60.198 77.978,60.198 81.026,57.15 v1(81.026,48.006) 80.645,48.387 69.596,48.387 68.453,47.244 68.453,45.085 69.723,43.815 70.612,43.815
  Bottom Layer w0.8: v1(9.398,36.449) 9.398,31.623 v1(9.652,31.369) ; 16.764,62.357 17.399,62.992 Cb1.1 ; 16.891,43.688 Cb2.1@16.891,46.609 ; v1(27.051,48.006) 27.178,48.006 36.068,39.116 v1(36.068,28.067) ; Cb4.1@43.688,46.863 Cb4.1 43.688,43.942 43.815,43.815 ; 43.688,62.484 44.069,62.865 Cb3.1 Cb3.1@44.069,65.532 ; v1(53.975,48.387) 53.975,47.625 62.992,38.608 62.992,28.321 v1(63.246,28.067) ; Cb5.1 70.358,62.611 70.485,62.484 ; 70.612,43.815 70.739,43.942 Cb6.1 Cb6.1@70.739,46.736 ; v1(81.026,48.006) 87.884,41.148 ; v1(88.392,28.448) 87.884,28.956 87.884,41.148 ; U3.4@89.027,43.434 89.027,45.466 Cb7.1 ; U3.4 87.884,41.529 87.884,41.148
Vi2: "JIN3_CELDA 2.3" "TPIN_CELDA 2.1" "TPIN_CELDA 2.2" "U1_CELDA 2.3" Vin.2@34.798,88.773 | length 54.5
  Bottom Layer w0.8: Vin.2@34.798,88.773 36.576,88.773 38.227,90.424 ; 45.212,95.631 40.767,95.631 38.227,95.631 38.227,90.424 ; 46.228,62.484 46.228,61.595 44.217,59.584 42.397,59.584 38.1,63.881 38.1,88.392 38.227,88.519 38.227,90.424
Vi3: "JIN3_CELDA 3.3" "TPIN_CELDA 3.1" "TPIN_CELDA 3.2" "U1_CELDA 3.3" Vin.2@61.976,88.646 | length 53.7
  Bottom Layer w0.8: Vin.2@61.976,88.646 63.627,88.646 65.024,90.043 ; 72.009,95.631 67.564,95.631 65.024,95.631 65.024,90.043 ; 73.025,62.484 73.025,61.595 71.374,59.944 68.834,59.944 64.897,63.881 64.897,88.392 65.024,88.519 65.024,90.043
VIN: "JIN3_CELDA 1.3" "TPIN_CELDA 1.1" "TPIN_CELDA 1.2" "U1_CELDA 1.3" Vin.1 | length 128.3
  Bottom Layer w0.8: Vin.1@4.318,41.743 8.128,45.553 8.128,52.451 15.113,59.436 ; 15.367,59.182 15.113,59.436 ; 19.304,62.357 19.304,61.468 17.653,59.817 15.494,59.817 15.113,59.436 ; Vin.1@34.798,91.313 34.798,94.996 ; Vin.1@61.976,91.186 62.103,91.313 62.103,94.869 59.563,97.409 37.084,97.409 34.798,95.123 34.798,94.996 ; 15.113,59.436 11.176,63.373 11.176,88.265 11.303,88.392 11.303,95.504 13.843,95.504 18.288,95.504 20.193,97.409 32.385,97.409 34.798,94.996
VinFT: "JIN3_CELDA 1.2" "JIN3_CELDA 2.2" "JIN3_CELDA 3.2" "R12_CELDA 1.1" "R12_CELDA 2.1" "R12_CELDA 3.1" "R15_CELDA 3.1" "R17_CELDA 1.1" "R17_CELDA 2.1" "R17_CELDA 3.1" "R20_CELDA 1.1" "R20_CELDA 2.1" "R20_CELDA 3.1" "R21_CELDA 1.1" "R21_CELDA 2.1" "R21_CELDA 3.1" R4.1@16.51,89.662 R4.1@43.434,89.789 R6.1 | length 191.8
  Top Layer w0.8: 20.828,95.504 20.828,96.393 21.844,97.409 45.974,97.409 47.752,95.631 47.752,96.266 49.022,97.536 72.644,97.536 74.549,95.631
  Bottom Layer w0.8: 16.383,69.469 15.875,68.961 14.478,68.961 13.589,69.85 13.589,71.882 14.732,73.025 ; 16.383,77.216 16.129,77.47 14.732,77.47 ; 16.383,81.407 14.605,81.407 ; 16.51,85.725 16.383,85.725 ; R6.1@16.637,73.025 16.383,73.025 14.732,73.025 ; 16.637,85.471 16.383,85.725 ; 20.701,95.504 20.828,95.504 16.51,91.186 16.51,89.662 14.605,89.662 13.589,88.646 13.589,86.868 14.732,85.725 ; 43.307,69.596 42.799,69.088 41.402,69.088 40.513,69.977 40.513,72.009 41.656,73.152 ; 43.307,77.343 43.053,77.597 41.656,77.597 ; 43.307,81.534 41.529,81.534 ; 43.434,85.852 43.307,85.852 ; R6.1@43.561,73.152 43.307,73.152 41.656,73.152 ; 43.561,85.598 43.307,85.852 ; 47.625,95.631 47.752,95.631 43.434,91.313 43.434,89.789 41.529,89.789 40.513,88.773 40.513,86.995 41.656,85.852 ; 70.104,69.596 69.596,69.088 68.199,69.088 67.31,69.977 67.31,72.009 68.453,73.152 ; 70.104,77.343 69.85,77.597 68.453,77.597 ; 70.104,81.534 68.326,81.534 ; 70.231,85.852 70.104,85.852 ; R6.1@70.358,73.152 70.104,73.152 68.453,73.152 ; 70.358,85.598 70.104,85.852 ; 74.422,95.631 74.549,95.631 70.231,91.313 70.231,89.789 68.326,89.789 67.31,88.773 67.31,86.995 68.453,85.852 ; 14.605,81.407 13.589,82.423 13.589,84.455 14.732,85.598 14.732,85.725 ; 14.605,81.407 13.589,80.391 13.589,78.613 14.732,77.47 ; 14.732,73.025 14.605,73.025 13.462,74.168 13.462,76.2 14.732,77.47 ; 14.732,85.725 16.383,85.725 ; 41.529,81.534 40.513,82.55 40.513,84.582 41.656,85.725 41.656,85.852 ; 41.529,81.534 40.513,80.518 40.513,78.74 41.656,77.597 ; 41.656,73.152 41.529,73.152 40.386,74.295 40.386,76.327 41.656,77.597 ; 41.656,85.852 43.307,85.852 ; 68.326,81.534 67.31,82.55 67.31,84.582 68.453,85.725 68.453,85.852 ; 68.326,81.534 67.31,80.518 67.31,78.74 68.453,77.597 ; 68.453,73.152 68.326,73.152 67.183,74.295 67.183,76.327 68.453,77.597 ; 68.453,85.852 70.104,85.852
Vo1: "R6_CELDA 1.2" "U2_CELDA 1.7" R2.1@16.51,77.47 R2.1@16.383,81.534 R8.2@18.796,85.725 Vin.3@34.798,86.233 | length 90.7
  Top Layer w0.8: R2.1@16.51,77.47 14.605,77.47 13.589,78.486 13.589,80.518 14.605,81.534 16.383,81.534 16.383,81.915 18.415,83.947 18.415,85.025 18.796,85.406 18.796,85.725 26.416,85.725 27.686,86.995 ; 21.971,36.068 21.971,37.465 23.368,38.862 26.035,38.862 31.369,44.196 31.369,80.518 31.369,83.312 ; 24.765,89.662 26.67,89.662 27.686,88.646 27.686,86.995 ; Vin.3@34.798,86.233 34.29,86.233 31.369,83.312 ; 27.686,86.995 31.369,83.312
Vo2: "R6_CELDA 2.2" "R8_CELDA 2.1" "U2_CELDA 2.7" R2.1@43.307,81.661 R8.2@45.72,85.852 Vin.3@61.976,86.106 | length 90.9
  Top Layer w0.8: 43.434,77.597 41.529,77.597 40.513,78.613 40.513,80.645 41.529,81.661 43.307,81.661 43.307,82.042 45.339,84.074 45.339,85.152 45.72,85.533 45.72,85.852 53.34,85.852 54.61,87.122 ; 48.895,36.195 48.895,37.592 50.292,38.989 52.959,38.989 58.293,44.323 58.293,80.645 58.293,83.439 ; 51.689,89.789 53.594,89.789 54.61,88.773 54.61,87.122 ; Vin.3@61.976,86.106 60.96,86.106 58.293,83.439 ; 54.61,87.122 58.293,83.439
Vo3: "R6_CELDA 3.2" "R8_CELDA 3.1" "R10_CELDA 3.1" "U2_CELDA 3.7" ?.7 ?.8 R8.2@72.517,85.852 U3.3 | length 108.3
  Top Layer w0.8: 70.231,77.597 68.326,77.597 67.31,78.613 67.31,80.645 68.326,81.661 70.104,81.661 70.104,82.042 72.136,84.074 72.136,85.152 72.517,85.533 72.517,85.852 80.137,85.852 81.407,87.122 ; 75.692,36.195 75.692,37.592 77.089,38.989 79.756,38.989 85.09,44.323 ; 78.486,89.789 80.391,89.789 81.407,88.773 81.407,87.122 ; U3.3@91.567,43.434 91.567,42.418 89.916,40.767 88.646,40.767 85.09,44.323 ; ?.7 85.09,77.851 ; 81.407,87.122 85.09,83.439 85.09,77.851 ; 85.09,44.323 85.09,77.851
  Bottom Layer w0.8: ?.7 ?.8
VOUT: ?.1 ?.2 U3.1 U3.2 | length 43.3
  Bottom Layer w0.8: ?.2 ?.1 90.932,78.359 89.281,76.708 89.281,55.626 92.583,52.324 92.583,46.101 95.25,43.434 U3.1@96.647,43.434
pads on no net: ?.3 ?.4 ?.5 ?.6 ?.9 ?.10 ?.11 ?.12 R1.1@11.938,6.731 R1.1@38.862,6.858 R1.1@65.659,6.858 R3.1@24.003,6.731 R3.1@50.927,6.858 R3.1@77.724,6.858

## Silkscreen, mask and mechanical layers (free items; w line width, h text height)
Top Overlay:
  lines w0.7: 9.525,1.524 9.525,91.44 ; 35.306,1.524 35.306,80.645 ; 62.103,1.651 62.103,81.153 ; 87.63,1.27 87.63,92.71
  text "OUT E2/IN E3" at 66.548,97.79 h1.52
  text "IN E1" at 15.875,97.663 h1.52
  text "OUT E1/IN E2" at 39.878,97.536 h1.52
  text "s/buff" at 38.735,92.202 h1.52
  text "c/buff" at 76.835,92.202 h1.52
  text "c/buff" at 22.987,92.075 h1.52
  text "c/buff" at 50.165,92.075 h1.52
  text "s/buff" at 65.278,92.075 h1.52
  text "s/buff" at 11.557,91.948 h1.52
  text "Vo c/b" at 89.281,82.169 h1.52
  text "Vo2" at 59.944,81.915 h1.52
  text "Vo1" at 33.147,81.788 h1.52
  text "Vo s/b" at 98.552,65.913 h1.52 r90
  text "GND" at 9.017,56.261 h1.52
  text "GND" at 91.186,54.737 h1.52
  text "VEE" at 2.413,47.498 h1.52
  text "GND" at 2.413,31.623 h1.52
  text "TC2019" at 89.916,20.574 h1.52
  text "CELDA 3" at 69.469,20.32 h2
  text "CELDA 2" at 40.513,20.066 h2
  text "CELDA 1" at 15.875,19.939 h2
  text "TP5-G1" at 90.297,17.145 h1.52
  text "Notch" at 90.805,10.922 h1.52
  text "ChebyII" at 89.535,8.128 h1.52
  text "orden6" at 89.789,5.207 h1.52